# Allegro board fpga_ccd_3.brd
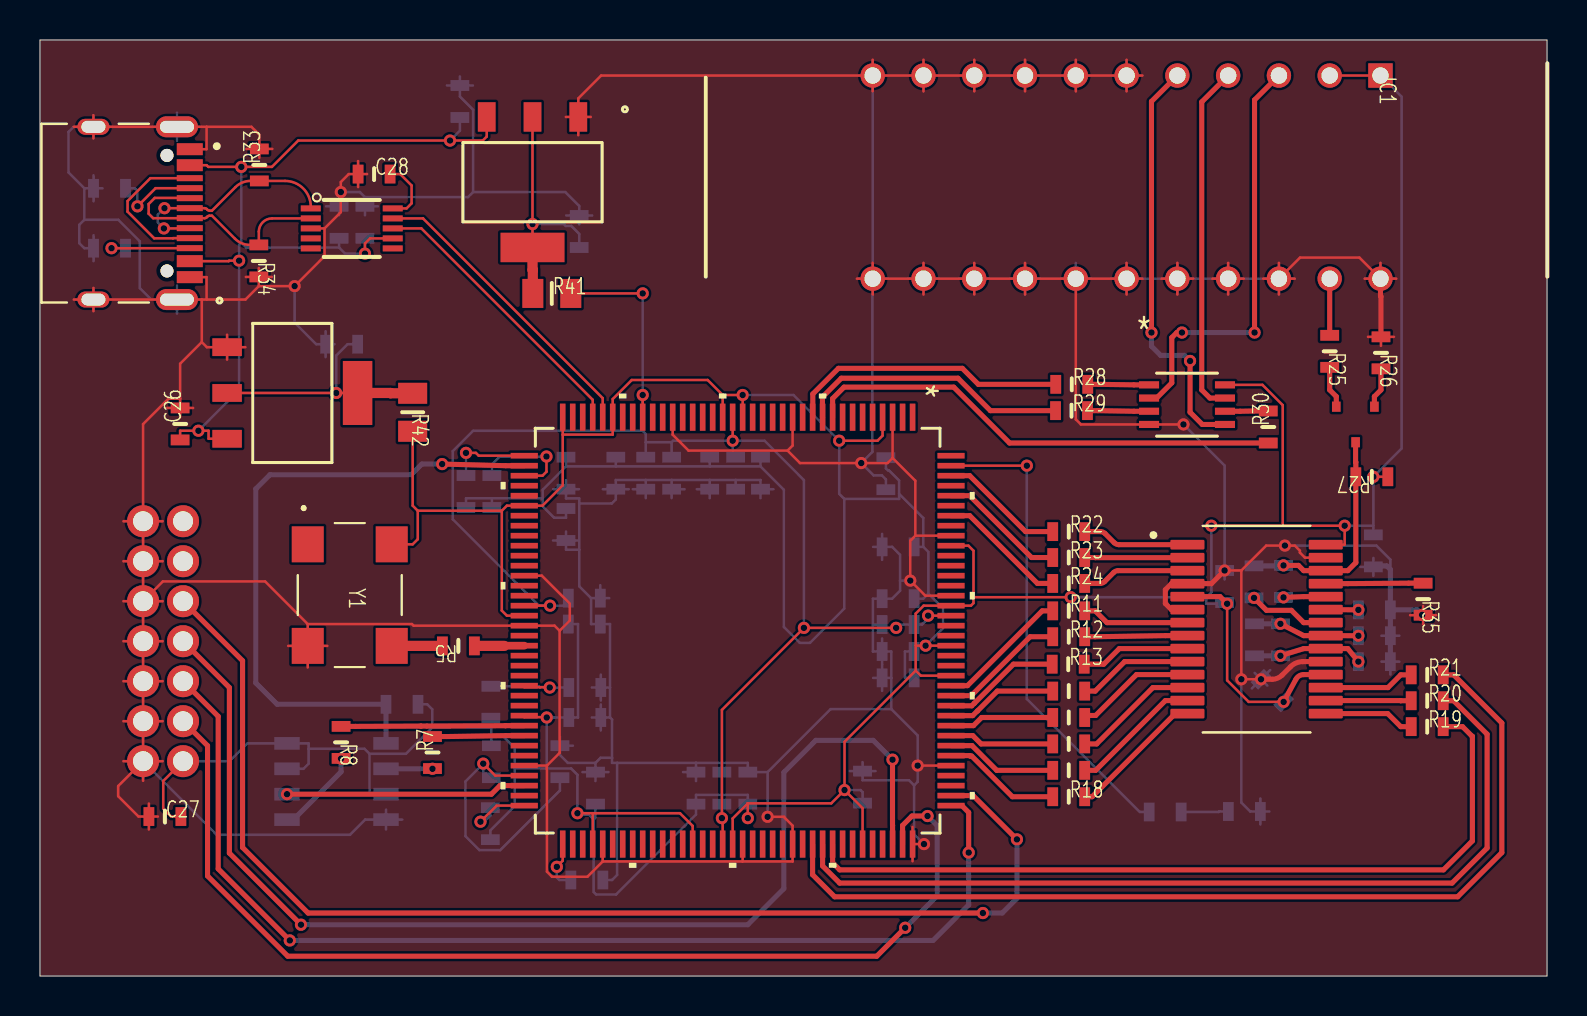
[diagram p0: board, top side]
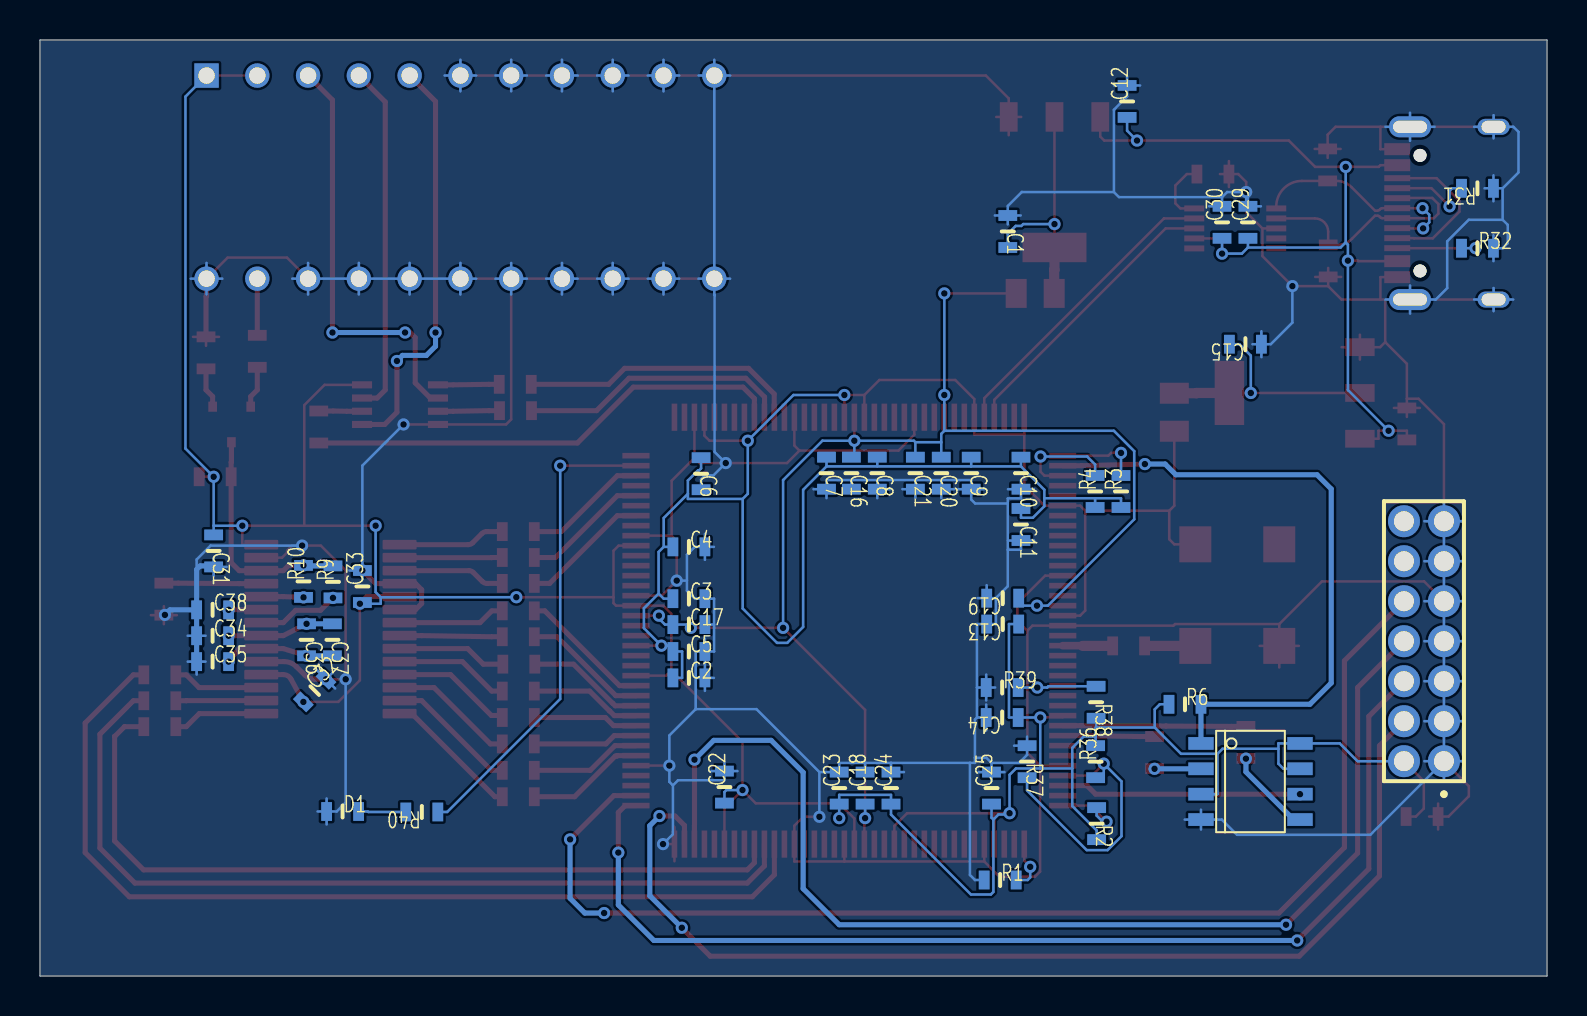
[diagram p1: board, bottom side, seen from below]

Outline 75.39 x 46.81 mm; copper layers: TOP, BOTTOM. Coordinates in mm from the lower left corner of the outline.
Outline path: 0,46.81 0,0 75.39,0 75.39,46.81 0,46.81

## Design rules (mm)
constraint set DEFAULT: min track width 0.127, pair gap 0.127
net group +1.2V: nets +1.2V N30787
net group ADCCLK: nets ADCCLK N43709
net group CCD_ICG: nets CCD_ICG N45930
net group CCD_MASTER: nets CCD_MASTER N46162
net group CCD_SH: nets CCD_SH N46224
net group CDSCLK1: nets CDSCLK1 N43637
net group CDSCLK2: nets CDSCLK2 N43673
net group CLK_50M: nets CLK_50M N10342
net group HT82V38_D0: nets HT82V38_D0 N42823
net group HT82V38_D1: nets HT82V38_D1 N42829
net group HT82V38_D2: nets HT82V38_D2 N42835
net group HT82V38_D3: nets HT82V38_D3 N42817
net group HT82V38_D4: nets HT82V38_D4 N42805
net group HT82V38_D5: nets HT82V38_D5 N42799
net group HT82V38_D6: nets HT82V38_D6 N42811
net group HT82V38_D7: nets HT82V38_D7 N42841
net group N39901: nets N39901 N39920
net group N45186: nets N45080 N45186
net group N103582: nets N103518 N103582
net group SCLK: nets N39538 SCLK
net group SDATA: nets N39540 SDATA
net group SLOAD: nets N39536 SLOAD
net group SPI_FLASH_MISO: nets N10587 SPI_FLASH_MISO
net group SPI_FLASH_MOSI: nets N10677 SPI_FLASH_MOSI
net group USB_D: nets USB_D+ USB_D-
net group CCD_OS: nets CCD_OS N41358 N41362

## Placement (name value [footprint] x y rotation side)
C1  10uF  [0603]  26.97 37.24 270 bottom
C2  10uF  [0603]  42.93 14.91 180 bottom
C3  100nF  [0603]  42.93 18.87 180 bottom
C4  100nF  [0603]  42.93 21.46 180 bottom
C5  100nF  [0603]  42.93 16.23 180 bottom
C6  100nF  [0603]  42.32 25.12 270 bottom
C7  100nF  [0603]  36.04 25.15 270 bottom
C8  100nF  [0603]  33.5 25.15 270 bottom
C9  100nF  [0603]  28.8 25.15 270 bottom
C10  100nF  [0603]  26.31 25.15 270 bottom
C11  100nF  [0603]  26.31 22.58 270 bottom
C12  10uF  [0603]  21.01 43.74 90 bottom
C13  100nF  [0603]  27.23 17.6 0 bottom
C14  100nF  [0603]  27.25 12.93 0 bottom
C15  10uF  [0603]  15.09 31.6 0 bottom
C16  10uF  [0603]  34.8 25.15 270 bottom
C17  100nF  [0603]  42.93 17.58 180 bottom
C18  100nF  [0603]  34.11 9.4 90 bottom
C19  100nF  [0603]  27.23 18.9 0 bottom
C20  100nF  [0603]  30.3 25.15 270 bottom
C21  100nF  [0603]  31.6 25.15 270 bottom
C22  100nF  [0603]  41.15 9.45 90 bottom
C23  100nF  [0603]  35.41 9.4 90 bottom
C24  100nF  [0603]  32.82 9.4 90 bottom
C25  100nF  [0603]  27.79 9.4 90 bottom
C26  10uF  [0603]  7.01 27.61 90 top
C27  100nF  [0603]  6.25 7.98 0 top
C28  100nF  [0603]  16.71 40.11 0 top
C29  10uF  [0603]  14.96 37.69 90 bottom
C30  10uF  [0603]  16.26 37.69 90 bottom
C31  100nF  [0603]  66.7 21.26 270 bottom
C32  100nF  [0603]  61.65 14.27 135 bottom
C33  100nF  [0603]  59.26 19.48 90 bottom
C34  100nF  [0603]  66.75 17.02 180 bottom
C35  100nF  [0603]  66.75 15.72 180 bottom
C36  100nF  [0603]  62.05 16.81 270 bottom
C37  10uF  [0603]  60.76 16.81 270 bottom
C38  100nF  [0603]  66.75 18.31 180 bottom
D1  LED  [0603]  60.25 8.23 180 bottom
IC1  TCD1304DG_8Z_AW_  [DIP1016W62P254L4160H372Q22N]  67.06 45.03 270 top
J1  CONN SOCKET 7x2  [CONN_BULK_HEADER_2X7_2_2]  5.16 10.74 90 bottom
J2  CQ-USB-C16PSMT01  [SHENZHEN-CHUANGQIN-TECHNOLO]  7.49 38.15 270 top
Q1  2SA1015  [SOT23]  65.81 27.58 270 top
R1  4.7K  [0603]  27.36 4.8 180 bottom
R2  4.7K  [0603]  22.53 7.62 270 bottom
R3  4.7K  [0603]  21.31 24.23 90 bottom
R4  4.7K  [0603]  22.61 24.23 90 bottom
R5  33  [0603]  20.93 16.51 180 top
R6  4.7K  [0603]  18.11 13.59 180 bottom
R7  33  [0603]  19.63 11.18 90 top
R8  33  [0603]  15.06 11.68 270 top
R9  NC  [0603]  60.73 19.71 90 bottom
R10  NC  [0603]  62.2 19.74 90 bottom
R11  33R  [0603]  51.46 18.26 0 top
R12  33R  [0603]  51.46 16.97 0 top
R13  33R  [0603]  51.43 15.6 0 top
R14  33R  [0603]  51.46 14.25 0 top
R15  33R  [0603]  51.46 12.93 0 top
R16  33R  [0603]  51.46 11.61 0 top
R17  33R  [0603]  51.46 10.29 0 top
R18  33R  [0603]  51.46 8.97 0 top
R19  33R  [0603]  69.39 12.47 0 top
R20  33R  [0603]  69.39 13.77 0 top
R21  33R  [0603]  69.39 15.06 0 top
R22  33R  [0603]  51.46 22.23 0 top
R23  33R  [0603]  51.46 20.93 0 top
R24  33R  [0603]  51.46 19.63 0 top
R25  150R  [0603]  64.52 31.24 270 top
R26  150R  [0603]  67.08 31.17 270 top
R27  150R  [0603]  66.62 24.97 180 top
R28  33R  [0603]  51.61 29.59 0 top
R29  33R  [0603]  51.6 28.27 0 top
R30  33R  [0603]  61.44 27.46 90 top
R31  5.1K  [0603]  3.48 39.4 0 bottom
R32  5.1K  [0603]  3.48 36.4 180 bottom
R33  45R  [0603]  10.97 40.56 90 top
R34  45R  [0603]  10.95 35.76 270 top
R35  1K  [0603]  69.19 18.85 270 top
R36  0R  [0603]  22.58 10.72 90 bottom
R37  NC  [0603]  26.01 10.72 270 bottom
R38  NC  [0603]  22.56 13.69 270 bottom
R39  1K  [0603]  27.25 14.43 180 bottom
R40  1K  [0603]  56.29 8.2 0 bottom
R41  10R  [0805]  25.6 34.14 0 top
R42  10R  [0805]  18.64 28.19 270 top
U1  XC6SLX9-2TQG144C_A  [TQG144_XIL]  34.9 17.27 270 top
U2  AMS1117-1.2v  [SOT_AMS1117-2P5_AMS]  24.64 39.7 180 top
U3  AMS1117-3.3v  [SOT_AMS1117-2P5_AMS]  12.62 29.16 270 top
U4  M25P16-VMN6TPBA  [SOIC8]  14.83 9.73 180 bottom
U5  CH340E  [MSOP-10]  15.6 37.39 0 top
U6  HT82V38  [SSOP-28]  60.86 17.35 0 top
U7  TC7WH14FU  [SSOP-8]  57.38 28.58 0 top
Y1  50MHz  [SMD7050]  15.49 19.05 270 top

## Library data of the parts
C1-C38 = CAP NP
D1 = LED
IC1 = TCD1304DG_8Z,AW_
J1 = CONN SOCKET 7x2
J2 = USB-C 16pin
Q1 = 2N6520
R1-R5 R7 R8 R36-R39 = RESISTOR
R6 = Res 0603
R9-R35 R40-R42 = R
U1 = XC6SLX9-2TQG144C: User Part Number: PN; Tolerance: TOL
U2 U3 = AMS1117: User Part Number: PN; Tolerance: TOL
U4 = M25P16-VMN6TPBA: Tolerance: ***; User Part Number: ***
U5 = CH340E
U6 = HT82V38
U7 = TC7WH14FU: User Part Number: PN; Tolerance: TOL
Y1 = Oscillator 4p

## Footprints (pads in the part's own frame, mm; a bottom-side part is the same pattern mirrored in y, then rotated)
0603
  rect 0.54x0.94 smd: 1(-0.8,0) 2(0.8,0)
0805
  rect 1.05x1.45 smd: 1(-0.95,0) 2(0.95,0)
CONN_BULK_HEADER_2X7_2_2
  round 1.6 hole 1: 1(0,0) 2(0,2) 3(2,0) 4(2,2) 5(4,0) 6(4,2) 7(6,0) 8(6,2) 9(8,0) 10(8,2) 11(10,0) 12(10,2) 13(12,0) 14(12,2)
DIP1016W62P254L4160H372Q22N
  rect 1.22x1.22 hole 0.82: 1(0,0)
  round 1.22 hole 0.82: 2(0,-2.54) 3(0,-5.08) 4(0,-7.62) 5(0,-10.16) 6(0,-12.7) 7(0,-15.24) 8(0,-17.78) 9(0,-20.32) 10(0,-22.86) 11(0,-25.4) 12(10.16,-25.4) 13(10.16,-22.86) 14(10.16,-20.32) 15(10.16,-17.78) 16(10.16,-15.24) 17(10.16,-12.7) 18(10.16,-10.16) 19(10.16,-7.62) 20(10.16,-5.08) 21(10.16,-2.54) 22(10.16,0)
MSOP-10
  rect 1x0.3 smd: 1(-2.05,1) 2(-2.05,0.5) 3(-2.05,0) 4(-2.05,-0.5) 5(-2.05,-1) 6(2.05,-1) 7(2.05,-0.5) 8(2.05,0) 9(2.05,0.5) 10(2.05,1)
SHENZHEN-CHUANGQIN-TECHNOLO
  round 0.65 hole 0.65 unplated: (-2.89,-1.14) (2.89,-1.14)
  rect 0.6x1.3 smd: A1_B12(-3.2,0) A4_B9(-2.4,0) B1_A12(3.2,0) B4_A9(2.4,0)
  rect 0.3x1.3 smd: A5(-1.25,0) A6(-0.25,0) A7(0.25,0) A8(1.25,0) B5(1.75,0) B6(0.75,0) B7(-0.75,0) B8(-1.75,0)
  oval 1.05x2.1 hole 0.6x1.7: S1(-4.32,-0.64) S2(4.32,-0.64)
  oval 0.8x1.6 hole 0.6x1.2: S3(-4.32,-4.82) S4(4.32,-4.82)
SMD7050
  rect 1.8x1.6 smd: 1(-2.54,-2.1) 2(2.54,-2.1) 3(2.54,2.1) 4(-2.54,2.1)
SOIC8
  rect 1.27x0.635 smd: 1(-2.477,1.905) 2(-2.477,0.635) 3(-2.477,-0.635) 4(-2.477,-1.905) 5(2.477,-1.905) 6(2.477,-0.635) 7(2.477,0.635) 8(2.477,1.905)
SOT23
  rect 0.508x0.432 smd: 1(-0.889,0.94) 2(-0.889,-0.965) 3(0.889,0)
SOT_AMS1117-2P5_AMS
  rect 0.889x1.473 smd: 1(-2.29,-3.264) 2(0,-3.264) 3(2.29,-3.264)
  rect 3.2x1.473 smd: 4(0,3.264)
SSOP-8
  rect 1.003x0.356 smd: 1(-1.899,0.991) 2(-1.899,0.33) 3(-1.899,-0.33) 4(-1.899,-0.991) 5(1.899,-0.991) 6(1.899,-0.33) 7(1.899,0.33) 8(1.899,0.991)
SSOP-28
  custom 1.7x0.48 smd: 1(-3.46,4.225) 2(-3.46,3.575) 3(-3.46,2.925) 4(-3.46,2.275) 5(-3.46,1.625) 6(-3.46,0.975) 7(-3.46,0.325) 8(-3.46,-0.325) 9(-3.46,-0.975) 10(-3.46,-1.625) 11(-3.46,-2.275) 12(-3.46,-2.925) 13(-3.46,-3.575) 14(-3.46,-4.225) 15(3.46,-4.225) 16(3.46,-3.575) 17(3.46,-2.925) 18(3.46,-2.275) 19(3.46,-1.625) 20(3.46,-0.975) 21(3.46,-0.325) 22(3.46,0.325) 23(3.46,0.975) 24(3.46,1.625) 25(3.46,2.275) 26(3.46,2.925) 27(3.46,3.575) 28(3.46,4.225)
TQG144_XIL
  rect 1.359x0.279 smd: 1(-10.674,8.75) 2(-10.674,8.25) 3(-10.674,7.75) 4(-10.674,7.25) 5(-10.674,6.75) 6(-10.674,6.25) 7(-10.674,5.75) 8(-10.674,5.25) 9(-10.674,4.75) 10(-10.674,4.25) 11(-10.674,3.75) 12(-10.674,3.25) 13(-10.674,2.75) 14(-10.674,2.25) 15(-10.674,1.75) 16(-10.674,1.25) 17(-10.674,0.75) 18(-10.674,0.25) 19(-10.674,-0.25) 20(-10.674,-0.75) 21(-10.674,-1.25) 22(-10.674,-1.75) 23(-10.674,-2.25) 24(-10.674,-2.75) 25(-10.674,-3.25) 26(-10.674,-3.75) 27(-10.674,-4.25) 28(-10.674,-4.75) 29(-10.674,-5.25) 30(-10.674,-5.75) 31(-10.674,-6.25) 32(-10.674,-6.75) 33(-10.674,-7.25) 34(-10.674,-7.75) 35(-10.674,-8.25) 36(-10.674,-8.75) 73(10.674,-8.75) 74(10.674,-8.25) 75(10.674,-7.75) 76(10.674,-7.25) 77(10.674,-6.75) 78(10.674,-6.25) 79(10.674,-5.75) 80(10.674,-5.25) 81(10.674,-4.75) 82(10.674,-4.25) 83(10.674,-3.75) 84(10.674,-3.25) 85(10.674,-2.75) 86(10.674,-2.25) 87(10.674,-1.75) 88(10.674,-1.25) 89(10.674,-0.75) 90(10.674,-0.25) 91(10.674,0.25) 92(10.674,0.75) 93(10.674,1.25) 94(10.674,1.75) 95(10.674,2.25) 96(10.674,2.75) 97(10.674,3.25) 98(10.674,3.75) 99(10.674,4.25) 100(10.674,4.75) 101(10.674,5.25) 102(10.674,5.75) 103(10.674,6.25) 104(10.674,6.75) 105(10.674,7.25) 106(10.674,7.75) 107(10.674,8.25) 108(10.674,8.75)
  rect 0.279x1.359 smd: 37(-8.75,-10.674) 38(-8.25,-10.674) 39(-7.75,-10.674) 40(-7.25,-10.674) 41(-6.75,-10.674) 42(-6.25,-10.674) 43(-5.75,-10.674) 44(-5.25,-10.674) 45(-4.75,-10.674) 46(-4.25,-10.674) 47(-3.75,-10.674) 48(-3.25,-10.674) 49(-2.75,-10.674) 50(-2.25,-10.674) 51(-1.75,-10.674) 52(-1.25,-10.674) 53(-0.75,-10.674) 54(-0.25,-10.674) 55(0.25,-10.674) 56(0.75,-10.674) 57(1.25,-10.674) 58(1.75,-10.674) 59(2.25,-10.674) 60(2.75,-10.674) 61(3.25,-10.674) 62(3.75,-10.674) 63(4.25,-10.674) 64(4.75,-10.674) 65(5.25,-10.674) 66(5.75,-10.674) 67(6.25,-10.674) 68(6.75,-10.674) 69(7.25,-10.674) 70(7.75,-10.674) 71(8.25,-10.674) 72(8.75,-10.674) 109(8.75,10.674) 110(8.25,10.674) 111(7.75,10.674) 112(7.25,10.674) 113(6.75,10.674) 114(6.25,10.674) 115(5.75,10.674) 116(5.25,10.674) 117(4.75,10.674) 118(4.25,10.674) 119(3.75,10.674) 120(3.25,10.674) 121(2.75,10.674) 122(2.25,10.674) 123(1.75,10.674) 124(1.25,10.674) 125(0.75,10.674) 126(0.25,10.674) 127(-0.25,10.674) 128(-0.75,10.674) 129(-1.25,10.674) 130(-1.75,10.674) 131(-2.25,10.674) 132(-2.75,10.674) 133(-3.25,10.674) 134(-3.75,10.674) 135(-4.25,10.674) 136(-4.75,10.674) 137(-5.25,10.674) 138(-5.75,10.674) 139(-6.25,10.674) 140(-6.75,10.674) 141(-7.25,10.674) 142(-7.75,10.674) 143(-8.25,10.674) 144(-8.75,10.674)

## Nets
+1.2V: C16.1 C17.1 C18.1 C19.1 C20.1 C21.1 R41.2 U1.19 U1.28 U1.52 U1.89 U1.128
+3.3V: C2.1 C3.1 C4.1 C5.1 C6.1 C7.1 C8.1 C9.1 C10.1 C11.1 C13.1 C14.1 C22.1 C23.1 C24.1 C25.1 C27.2 C31.1 C32.1 C33.1 IC1.1(\VDD\) IC1.2 J1.2 R2.2 R3.1 R4.1 R6.1 R27.1 R36.2 R38.2 R42.2 U1.4 U1.18 U1.20 U1.31 U1.36 U1.42 U1.53 U1.63 U1.76 U1.86 U1.90 U1.103(\VCCO_1_2\) U1.122 U1.125 U1.129 U1.135 U4.3(\W-\) U4.7 U4.8 U6.5 U6.18 U6.28 U7.8(\VCC\) Y1.4(\VCC\)
+5V: C12.1 C26.1 C29.1 C30.1 J2.A4_B9 J2.B4_A9(\VBUS#B4_A9\) U2.3 U3.3 U5.7(\VCC\)
GND: C1.1 C2.2 C3.2 C4.2 C5.2 C6.2 C7.2 C8.2 C9.2 C10.2 C11.2 C12.2 C13.2 C14.2 C15.1 C16.2 C17.2 C18.2 C19.2 C20.2 C21.2 C22.2 C23.2 C24.2 C25.2 C26.2 C27.1 C28.1 C29.2 C30.2 C31.2 C32.2 C33.2 C34.1 C35.1 C38.1 D1.1(\CATHODE\) IC1.6 IC1.7 IC1.8 IC1.9 IC1.10 IC1.11 IC1.12 IC1.13 IC1.14 IC1.15 IC1.16 IC1.17 IC1.18 IC1.19 IC1.20 IC1.22 J1.1 J1.3 J1.5 J1.7 J1.9 J1.11 J1.13 J2.A1_B12 J2.B1_A12 J2.S1 J2.S2 J2.S3 J2.S4 R1.1 R26.1 R31.1 R32.2 R33.2 R34.2 R35.2 R37.1 R39.1 U1.3 U1.13 U1.25 U1.49 U1.54 U1.68 U1.77 U1.91 U1.96 U1.108 U1.113 U1.130 U1.136 U2.1 U3.1 U4.4 U5.3 U6.4 U6.6 U6.19 U6.27 U7.4 Y1.2
ADCCLK: R24.1 U1.138
CCD_ICG: R30.1 U1.9
CCD_MASTER: R28.1 U1.11
CCD_OS: Q1.3 R9.2 R10.2 R27.2 U6.26(\VINR\)
CCD_SH: R29.1 U1.10
CDSCLK1: R22.1 U1.142
CDSCLK2: R23.1 U1.140
CLK_50M: R5.1 U1.56
HT82V38_D0: R18.1 U1.114
HT82V38_D1: R17.1 U1.115
HT82V38_D2: R16.1 U1.116
HT82V38_D3: R15.1 U1.117
HT82V38_D4: R14.1 U1.118
HT82V38_D5: R13.1 U1.119
HT82V38_D6: R12.1 U1.120
HT82V38_D7: R11.1 U1.121
M0: R36.1 R37.2 U1.69
M1: R38.1 R39.2 U1.60
SCLK: R20.2 U1.99
SDATA: R19.2 U1.100
SLOAD: R21.2 U1.98
SPI_FLASH_CLK: U1.70 U4.6
SPI_FLASH_CSO: R6.2 U1.38 U4.1
SPI_FLASH_MISO: R7.2 U1.65
SPI_FLASH_MOSI: R8.1 U1.64
TCK_F: J1.6 U1.109
TDI_F: J1.10 U1.110
TDO_F: J1.8 U1.106
TMS_F: J1.4(9) U1.107
UART_RXD: U1.33 U5.8
UART_TXD: U1.32 U5.9
USB_D+: J2.A6 J2.B6 R33.1 U5.1
USB_D-: J2.A7 J2.B7 R34.1 U5.2
N00968: R4.2 U1.39
N10342: R5.2 Y1.3
N10587: R7.1 U4.2
N10677: R8.2 U4.5
N14884: R3.2 U1.37
N15354: R1.2 U1.73
N15645: R2.1 U1.72
N29928: C28.2 U5.10
N30787: C1.2 R41.1 U2.2 U2.4(\VOUT\)
N30939: C15.2 R42.1 U3.2 U3.4(\VOUT\)
N39536: R21.1 U6.17
N39538: R20.1 U6.16
N39540: R19.1 U6.15
N39901: C35.2 C36.2 C37.2 U6.20
N39920: C34.2 C36.1 C37.1 U6.21
N40100: C38.2 U6.23
N41358: R10.1 U6.24
N41362: R9.1 U6.22
N41426: R35.1 U6.25
N42799: R13.2 U6.9
N42805: R14.2 U6.10
N42811: R12.2 U6.8
N42817: R15.2 U6.11
N42823: R18.2 U6.14
N42829: R17.2 U6.13
N42835: R16.2 U6.12
N42841: R11.2 U6.7
N43637: R22.2 U6.1
N43673: R23.2 U6.2
N43709: R24.2 U6.3
N45080: IC1.21 R25.1
N45186: Q1.2 R25.2
N45216: Q1.1(\EMITTER\) R26.2
N45901: IC1.5 U7.5
N45905: IC1.3 U7.2
N45930: R30.2 U7.6
N46162: R28.2 U7.1
N46224: R29.2 U7.3
N46412: IC1.4 U7.7
N48976: J2.B5 R32.1
N49298: J2.A5 R31.2
N49459: J2.A8 J2.B8
N103518: R40.1 U1.143
N103582: D1.2 R40.2

Pads without a net: J1 12 14; U1 1 2 5 6 7 8 12 14 15 16 17 21 22 23 24 26 27 29 30 34 35 40 41 43 44 45 46 47 48 50 51 55 57 58 59 61 62 66 67 71 74 75 78 79 80 81 82 83 84 85 87 88 92 93 94 95 97 101 102 104 105 111 112 123 124 126 127 131 132 133 134 137 139 141 144; U5 4 5 6; Y1 1

## Via types
v1: diameter 0.61, hole 0.33, TOP to BOTTOM, 76 vias

## Routing (per net, layer and track width the routed paths; a pad name or vN(x,y) marks a point on that pad's centre or on a via; arc(x,y) is an arc through that point)
+1.2V: length 75.5
  TOP w0.127: R41.2 v1(30.15,34.14) ; U1.52 v1(25.51,18.52) ; v1(42.83,17.41) v1(38.21,17.41) 34.11,13.31 v1(34.11,7.9) 34.15,7.86 U1.89 ; U1.28 v1(30.15,29.06) ; U1.19 v1(34.65,26.77) ; U1.128 v1(44.43,18.02)
  BOTTOM w0.127: 30.15,27.27 30.3,27.11 30.3,26.7 ; 30.15,27.27 21.67,27.27 20.65,26.25 20.65,22.84 24.97,18.52 v1(25.51,18.52) 26.43,18.52 C19.1 ; 30.15,27.27 v1(30.15,29.06) v1(30.15,34.14) ; v1(38.21,17.41) 38.21,24.8 36.25,26.77 v1(34.65,26.77) ; v1(34.65,26.77) 31.67,26.77 31.6,26.7 ; v1(34.65,26.77) 34.65,25.95 C16.1 ; C18.1 v1(34.11,7.9) ; v1(42.83,17.41) 42.99,17.58 C17.1 44.12,17.58 44.43,17.88 v1(44.43,18.02) ; 30.3,26.7 31.6,26.7 ; 30.3,26.7 C20.1 ; 31.6,26.7 C21.1
+3.3V: length 292.2
  TOP w0.127: v1(40.25,9.3) 39.58,8.64 35.41,8.64 ; v1(40.25,9.3) 40.25,11.72 43.81,15.28 ; v1(40.25,9.3) 41.15,8.4 U1.103 ; 43.81,15.28 44.06,15.02 U1.122 ; 43.81,15.28 43.81,16.52 ; v1(62.21,13.71) 60.46,13.71 59.39,14.79 v1(59.39,18.62) ; v1(51.56,18.95) 46.7,18.95 ; 46.7,18.95 46.7,21.27 46.44,21.52 U1.135 ; 46.7,18.95 46.7,18.65 46.57,18.52 U1.129 44.2,18.52 43.81,18.12 43.81,16.52 ; U1.125 v1(44.3,16.52) 43.81,16.52 ; 18.9,23.27 23.1,23.27 ; 18.9,23.27 18.64,23.52 R42.2 ; 18.9,23.27 18.9,21.84 18.64,21.59 Y1.4 ; 23.1,23.27 23.1,18.28 23.36,18.02 U1.53 ; 23.1,23.27 23.36,23.52 U1.42 25.13,23.52 26.15,24.54 26.15,27.08 ; v1(39.98,26.77) 41.9,26.77 42.15,27.03 U1.4 ; U6.28 65.27,21.57 v1(65.27,22.52) 62.17,22.52 ; R27.1 v1(66.7,24.97) ; C27.2 6.56,7.98 6.17,8.37 6.17,9.75 J1.2 ; 26.15,27.08 28.65,27.08 U1.31 28.65,28.85 29.6,29.81 33.4,29.81 34.15,29.06 ; 26.15,27.08 U1.36 ; U1.18 v1(35.15,29.06) 34.15,29.06 ; 34.15,29.06 U1.20 ; 35.41,8.64 v1(35.41,7.9) ; 35.41,8.64 34.65,7.88 U1.90 ; U7.8 61.15,29.57 62.17,28.55 62.17,22.52 ; 27.65,8.14 v1(26.89,8.14) ; 27.65,8.14 U1.76 ; 27.65,8.14 32.01,8.14 32.65,7.51 U1.86 ; 62.17,22.52 v1(58.6,22.52) ; U1.63 24.23,12.95 25.33,12.95 v1(25.35,12.93) ; IC1.2 IC1.1
  TOP w0.254: U6.18 63.21,15.07 arc(62.99,15.01) 62.83,14.84 v1(62.21,13.71) ; v1(59.39,18.62) 59.03,18.97 U6.5
  BOTTOM w0.127: v1(40.25,9.3) 41.05,9.3 41.15,9.2 C22.1 ; 25.35,10.38 v1(25.35,12.93) C14.1 26.91,12.93 26.91,17.6 C13.1 ; 25.35,10.38 26.57,10.38 26.89,10.06 v1(26.89,8.14) 26.95,8.08 27.44,8.08 27.7,7.82 ; 25.35,10.38 23.75,10.38 ; C3.1 44.19,18.87 44.44,19.13 ; 13.44,11.37 13.44,11.63 U4.8 10.37,11.63 9.48,10.74 J1.2 ; 13.44,11.37 16.23,11.37 16.48,11.11 ; 13.44,11.37 13.44,10.62 13.18,10.36 U4.7 ; 66.7,22.52 v1(66.7,24.97) 68.11,26.38 68.11,43.98 IC1.1 ; 66.7,22.52 C31.1 ; 66.7,22.52 v1(65.27,22.52) ; 44.44,19.13 44.44,21.21 44.19,21.46 ; 44.44,19.13 45.18,18.39 45.18,17.4 v1(44.3,16.52) 43.73,16.52 C5.1 43.27,16.23 43.27,14.91 C2.1 ; 40.23,23.86 40.23,18.38 38.52,16.66 38.01,16.66 37.21,17.46 37.21,24.32 36.04,25.49 ; 40.23,23.86 39.98,24.11 v1(39.98,26.77) 37.69,29.06 v1(35.15,29.06) ; 40.23,23.86 42.98,23.86 42.98,24.11 ; 19.62,12.43 18.31,11.11 16.48,11.11 ; 19.62,12.43 19.62,13.33 19.37,13.59 R6.1 ; 19.62,12.43 22.56,12.43 ; R4.1 22.61,23.89 ; 22.61,23.89 21.31,23.89 R3.1 ; 22.61,23.89 25.15,23.89 ; 27.7,7.82 27.7,4.2 27.82,4.08 28.82,4.08 32.82,8.08 C24.1 32.82,9.06 35.41,9.06 C23.1 v1(35.41,7.9) ; 27.7,7.82 27.79,7.92 C25.1 ; 44.19,21.46 44.19,22.9 42.98,24.11 ; 44.19,21.46 C4.1 ; C6.1 42.32,25.39 42.42,25.29 42.47,25.29 42.98,24.78 42.98,24.11 ; v1(59.39,18.62) 58.34,18.62 58.34,18.95 ; 36.04,25.49 33.5,25.49 ; 36.04,25.49 C7.1 ; U4.3 16.48,9.09 16.48,11.11 ; 22.58,11.98 22.58,12.4 22.56,12.43 ; 22.58,11.98 R36.2 ; 22.58,11.98 23.18,11.98 23.75,11.41 23.75,10.38 ; 22.56,12.43 R38.2 ; 33.5,25.49 28.8,25.49 ; 33.5,25.49 C8.1 ; 25.15,23.89 25.15,24.32 26.31,25.49 ; 25.15,23.89 25.15,23.49 25.72,22.92 26.31,22.92 C11.1 ; 23.75,10.38 23.75,8.5 22.53,7.28 R2.2 ; 58.34,18.95 58.6,19.2 v1(58.6,22.52) ; 58.34,18.95 v1(51.56,18.95) ; 28.8,25.49 26.31,25.49 ; 28.8,25.49 C9.1 ; 26.31,25.49 C10.1
+5V: length 47.3
  TOP w0.127: v1(9.96,35.78) 9.47,35.78 9.44,35.75 J2.B4_A9 ; C26.1 7.01,27.27 v1(7.92,27.27) 8.43,27.27 8.43,26.87 U3.3 ; U5.7 16.51,36.89 16.26,36.63 v1(16.26,36.13) ; U2.3 22.35,41.98 22.15,41.78 v1(20.51,41.78) 12.92,41.78 11.6,40.47 v1(10.07,40.47) 8.42,40.47 8.33,40.55 J2.A4_B9
  BOTTOM w0.127: C29.1 14.96,36.43 ; 14.96,36.43 10.33,36.43 10.07,36.69 ; 14.96,36.43 15.27,36.13 v1(16.26,36.13) C30.1 ; 10.07,36.69 9.96,36.58 v1(9.96,35.78) 9.96,29.31 v1(7.92,27.27) ; 10.07,36.69 v1(10.07,40.47) ; C12.1 21.01,42.28 v1(20.51,41.78)
GND: length 630.8
  TOP w0.127: J1.7 6.13,16.74 ; J1.7 5.16,17.72 ; J1.7 4.18,16.74 ; J1.7 5.16,15.77 ; IC1.6 55.14,45.03 ; IC1.6 IC1.7 ; IC1.6 54.36,45.82 ; IC1.6 54.36,44.25 ; J1.3 5.16,13.72 ; J1.3 5.16,11.77 ; J1.3 4.18,12.74 ; J1.3 6.13,12.74 ; U3.1 8.35,31.45 8.09,31.7 ; U3.1 9.36,30.83 ; U3.1 10.27,31.45 ; U3.1 9.36,32.07 ; 44.2,44.25 IC1.10 ; IC1.10 IC1.9 ; IC1.10 44.2,45.82 ; IC1.10 IC1.11 ; J1.1 5.16,11.72 ; J1.1 6.13,10.74 ; J1.1 4.18,10.74 ; J1.1 5.16,9.77 ; J1.1 3.91,9.5 3.91,8.99 4.93,7.98 C27.1 ; IC1.7 IC1.8 ; IC1.7 51.82,44.25 ; IC1.7 51.82,45.82 ; 5.16,17.77 J1.9 ; J1.9 6.15,19.73 11.26,19.73 13.39,17.6 ; J1.9 6.13,18.74 ; J1.9 5.16,19.72 ; J1.9 4.18,18.74 ; 67.08,31.52 R26.1 ; R26.1 66.43,31.97 ; R26.1 67.73,31.97 ; 8.33,42.47 8.33,41.35 J2.A1_B12 ; 8.33,42.47 10.58,42.47 10.97,42.07 R33.2 ; 8.33,42.47 J2.S1 J2.S3 ; 61.98,34.09 IC1.20 ; IC1.20 62.76,34.87 ; IC1.20 61.19,34.87 ; IC1.20 61.98,35.66 ; IC1.20 63.03,35.93 66,35.93 IC1.22 ; 28.15,5.73 27.39,4.97 25.61,4.97 25.36,5.22 25.36,10.52 ; 28.15,5.73 U1.77 ; 28.15,5.73 35.15,5.73 ; 8.09,31.7 7.01,30.62 7.01,28.87 ; 8.09,31.7 8.09,33.83 ; C27.1 5.45,8.62 ; C27.1 5.45,7.33 ; C27.1 5.9,7.98 ; IC1.18 57.68,34.87 ; IC1.18 56.9,35.66 ; IC1.18 56.11,34.87 ; IC1.18 56.9,34.09 ; 26.31,42.96 U2.1 ; U2.1 26.93,43.89 28.07,45.03 IC1.11 ; U2.1 26.93,42.05 ; U2.1 27.55,42.96 ; 25.36,10.52 25.99,11.16 25.99,17.27 ; 25.36,10.52 U1.68 ; v1(57.2,27.58) U7.4 52.07,27.58 51.82,27.84 IC1.16 ; 8.33,33.83 8.33,34.95 J2.B1_A12 ; 8.33,33.83 10.28,33.83 10.95,34.5 ; 8.33,33.83 8.09,33.83 ; U5.3 14.24,37.39 ; 14.24,37.39 14.24,36 v1(12.74,34.5) 10.95,34.5 ; 14.24,37.39 15.05,38.2 v1(15.05,39.21) 15.05,39.71 15.45,40.11 C28.1 ; IC1.11 41.66,44.25 ; IC1.11 41.66,45.82 ; 7.01,28.87 6.43,28.87 5.16,27.6 J1.13 ; 7.01,28.87 C26.2 ; C28.1 16.36,40.11 ; C28.1 15.91,40.76 ; C28.1 15.91,39.46 ; 4.18,22.74 J1.13 ; J1.13 6.13,22.74 ; J1.13 5.16,21.77 ; IC1.12 IC1.13 ; IC1.12 40.87,34.87 ; IC1.12 41.66,34.09 ; IC1.12 41.66,35.66 ; IC1.13 44.2,34.09 ; IC1.13 IC1.14 ; IC1.13 44.2,35.66 ; 43.79,22.02 43.79,24.77 42.65,25.91 ; 43.79,22.02 43.54,21.77 v1(43.54,19.77) 44.29,19.02 U1.130 ; 43.79,22.02 U1.136 ; U1.3 42.65,25.91 ; 42.65,25.91 42.4,25.65 v1(41.08,25.65) 38.02,25.65 37.4,26.28 ; U1.108 43.65,7.46 ; U1.108 43.65,5.74 ; U1.108 v1(44.22,6.6) ; R35.2 69.19,18.5 ; R35.2 68.54,18.05 ; R35.2 69.84,18.05 ; R35.2 69.19,17.6 ; U1.91 35.15,5.73 ; 35.15,5.73 37.65,5.73 U1.96 37.65,7.52 37.21,7.96 v1(36.4,7.96) ; 37.4,26.28 37.65,26.53 U1.13 ; 37.4,26.28 32.44,26.28 31.65,27.07 U1.25 ; 46.74,34.09 IC1.14 ; IC1.14 IC1.15 ; IC1.14 46.74,35.66 ; 49.28,34.09 IC1.15 ; IC1.15 IC1.16 ; IC1.15 49.28,35.66 ; IC1.16 IC1.17 ; J2.S4 2.67,34.41 ; J2.S4 2.67,33.25 ; J2.S4 1.69,33.83 ; J2.S4 J2.S2 8.09,33.83 ; 5.16,13.77 J1.5 ; J1.5 4.18,14.74 ; J1.5 6.13,14.74 ; J1.5 5.16,15.72 ; R34.2 10.95,34.5 ; R34.2 10.95,35.41 ; R34.2 10.3,34.96 ; R34.2 11.6,34.96 ; 54.36,34.09 IC1.17 ; IC1.17 54.36,35.66 ; IC1.17 55.14,34.87 ; 2.67,41.89 J2.S3 ; J2.S3 2.67,43.05 ; J2.S3 1.69,42.47 ; 13.39,15.43 Y1.2 ; Y1.2 13.39,17.6 ; Y1.2 14.37,16.51 ; Y1.2 12.42,16.51 ; IC1.9 46.74,45.82 ; IC1.9 IC1.8 ; IC1.9 46.74,44.25 ; IC1.22 67.84,34.87 ; IC1.22 66.27,34.87 ; IC1.22 67.06,35.66 ; U6.27 63.28,20.92 63.02,21.18 63.02,21.27 62.77,21.53 v1(62.27,21.53) 61.34,21.53 60.1,20.28 ; 25.99,17.27 25.74,17.52 U1.54 18.69,17.52 18.61,17.6 13.39,17.6 ; 25.99,17.27 26.5,17.78 26.5,18.63 25.1,20.02 U1.49 ; 58.65,34.87 IC1.19 ; IC1.19 60.22,34.87 ; IC1.19 59.44,34.09 ; IC1.19 59.44,35.66 ; 60.1,20.28 v1(60.1,14.84) v1(61.08,14.84) ; 60.1,20.28 v1(59.26,20.28) ; C26.2 7.66,28.41 ; C26.2 6.36,28.41 ; C26.2 7.01,27.96 ; U1.113 v1(43.9,10.52) ; 10.97,40.92 R33.2 ; R33.2 10.32,41.36 ; R33.2 11.62,41.36 ; J1.11 5.16,21.72 ; J1.11 5.16,19.77 ; J1.11 6.13,20.74 ; J1.11 4.18,20.74 ; IC1.8 49.28,45.82 ; IC1.8 49.28,44.25
  TOP w0.254: U6.6 56.6,18.32 56.29,18.63 56.29,19.32 56.6,19.62 U6.4 58.6,19.62 v1(59.26,20.28) ; R26.1 67.08,33.98 67.06,34.01 IC1.22 ; U6.19 63.17,15.72 arc(62.84,15.66) 62.56,15.47 62.13,15.04 arc(61.9,14.89) 61.64,14.84 v1(61.08,14.84)
  BOTTOM w0.127: C19.2 28.03,19.55 ; C19.2 27.57,18.9 ; C19.2 28.48,18.9 ; J1.9 6.13,18.74 ; J1.9 4.18,18.74 ; J1.9 J1.7 ; J1.9 J1.11 ; 2.22,37.82 1.97,37.57 1.97,36.65 2.22,36.4 R32.2 ; 2.22,37.82 3.91,37.82 4.99,36.74 4.99,34.4 5.57,33.83 J2.S2 ; 2.22,37.82 2.22,39.4 ; 20.36,44.54 C12.2 ; C12.2 21.65,44.54 ; C12.2 21.01,44.99 ; C12.2 21.01,43.98 21.67,43.32 21.67,39.21 ; 36.4,10.2 C23.2 35.41,10.66 34.11,10.66 ; 36.4,10.2 39.55,13.35 42.59,13.35 ; 36.4,10.2 v1(36.4,7.96) ; C1.1 26.97,38.51 26.28,39.21 21.67,39.21 ; C1.1 26.33,38.04 ; C1.1 26.97,37.59 ; C1.1 27.62,38.04 ; 26.98,23.63 26.98,21.32 ; 26.98,23.63 26.98,23.89 26.31,23.89 C10.2 ; 26.98,23.63 28.6,23.63 28.8,23.83 C9.2 ; 26.98,21.32 26.98,19.49 27.57,18.9 ; 26.98,21.32 26.31,21.32 C11.2 ; R31.1 3.13,39.4 ; R31.1 2.68,38.75 ; R31.1 2.68,40.04 ; R31.1 2.22,39.4 ; 54.36,44.25 IC1.6 ; IC1.6 54.36,45.82 ; IC1.6 55.14,45.03 ; IC1.6 53.57,45.03 ; C2.2 42.59,14.91 ; C2.2 42.13,14.26 ; C2.2 42.13,15.56 ; C2.2 41.68,14.91 ; 42.59,14.91 42.59,13.35 ; 42.59,14.91 42.59,16.23 C5.2 ; C20.2 30.3,24.81 ; C20.2 29.65,24.35 ; C20.2 30.3,23.9 ; 30.3,24.81 31.6,24.81 ; 30.3,24.81 28.8,24.81 C9.2 ; 51.03,34.87 IC1.16 ; IC1.16 51.82,34.09 ; IC1.16 51.82,35.66 ; IC1.16 52.6,34.87 ; 27.61,14.43 R39.1 ; R39.1 28.05,15.08 ; R39.1 28.51,14.43 ; R39.1 28.05,13.78 ; C6.2 42.32,24.84 42.12,25.04 41.7,25.04 v1(41.08,25.65) 41.64,26.21 41.64,34.06 41.66,34.07 IC1.12 ; C22.2 41.15,9.79 43.47,9.79 43.73,9.53 ; C22.2 41.15,10.7 ; C22.2 41.8,10.25 ; C22.2 40.5,10.25 ; IC1.18 56.9,35.66 ; IC1.18 IC1.19 ; IC1.18 56.9,34.09 ; IC1.18 IC1.17 ; C21.2 31.6,24.81 ; C21.2 32.25,24.35 ; C21.2 31.6,23.9 ; 31.6,24.81 33.5,24.81 ; C15.1 14.74,31.6 ; C15.1 14.29,32.25 ; C15.1 14.29,30.95 ; C15.1 13.82,31.6 12.74,32.68 v1(12.74,34.5) ; 16.26,38.95 21.41,38.95 21.67,39.21 ; 16.26,38.95 16,39.21 v1(15.05,39.21) 15.05,38.49 C29.2 ; 16.26,38.95 C30.2 ; 67.06,34.09 IC1.22 ; IC1.22 67.84,34.87 ; IC1.22 67.06,35.66 ; IC1.22 66.27,34.87 ; 32.82,9.75 C24.2 ; C24.2 32.82,10.66 ; C24.2 32.17,10.2 ; 28.87,10.66 28.87,5.05 28.62,4.8 R1.1 ; 28.87,10.66 32.82,10.66 ; 28.87,10.66 28.62,10.66 28.62,10.91 ; 4.18,22.74 J1.13 ; J1.13 5.16,23.72 ; J1.13 6.13,22.74 ; J1.13 J1.11 ; C4.2 42.63,21.46 43.02,21.07 43.02,19.77 ; C4.2 42.13,20.81 ; C4.2 41.68,21.46 ; C4.2 42.13,22.11 ; J2.S3 1.68,42.47 1.43,42.22 1.43,40.19 2.22,39.4 ; J2.S3 2.67,43.05 ; J2.S3 2.67,41.89 ; J2.S3 3.65,42.47 ; 32.82,10.66 34.11,10.66 ; 40.87,34.87 IC1.12 ; IC1.12 42.44,34.87 ; IC1.12 IC1.11 ; J1.3 6.13,12.74 ; J1.3 4.18,12.74 ; J1.3 J1.1 ; J1.3 J1.5 ; C7.2 36.69,24.35 ; C7.2 36.04,23.9 ; C7.2 36.04,24.81 34.8,24.81 ; IC1.15 49.28,35.66 ; IC1.15 50.06,34.87 ; IC1.15 48.49,34.87 ; IC1.15 49.28,34.09 ; 60.76,15.16 v1(61.08,14.84) ; v1(61.08,14.84) 61.4,14.52 ; v1(61.08,14.84) 60.62,14.38 ; v1(61.08,14.84) 61.54,15.3 ; 45.95,34.87 IC1.14 ; IC1.14 47.52,34.87 ; IC1.14 46.74,34.09 ; IC1.14 46.74,35.66 ; IC1.19 59.44,35.66 ; IC1.19 59.44,34.09 ; IC1.19 IC1.20 ; IC1.8 49.28,45.82 ; IC1.8 49.28,44.25 ; IC1.8 48.49,45.03 ; IC1.8 50.06,45.03 ; 28.62,10.91 28.04,10.91 27.79,10.66 ; 28.62,10.91 28.62,12.83 28.51,12.93 ; 51.03,45.03 IC1.7 ; IC1.7 52.6,45.03 ; IC1.7 51.82,45.82 ; IC1.7 51.82,44.25 ; 4.18,14.74 J1.5 ; J1.5 J1.7 ; J1.5 6.13,14.74 ; 27.79,10.66 26.41,10.66 26.01,11.06 R37.1 ; 27.79,10.66 C25.2 ; 40.87,45.03 IC1.11 ; IC1.11 41.66,45.82 ; IC1.11 42.44,45.03 ; U4.4 17.31,8.32 ; U4.4 16.27,7.82 15.51,7.06 8.84,7.06 J1.1 ; U4.4 17.31,7.33 ; U4.4 18.12,7.82 ; IC1.10 44.2,45.82 ; IC1.10 43.41,45.03 ; IC1.10 44.2,44.25 ; IC1.10 44.98,45.03 ; 27.57,18.9 27.57,17.6 C13.2 28.51,17.6 28.51,14.43 ; 28.51,12.93 28.51,14.43 ; 28.51,12.93 C14.2 ; 5.16,9.77 J1.1 ; J1.1 6.13,10.74 ; J1.1 4.18,10.74 ; IC1.17 54.36,35.66 ; IC1.17 53.57,34.87 ; IC1.17 54.36,34.09 ; C14.2 28.05,13.58 ; C14.2 27.61,12.93 ; C14.2 28.05,12.28 ; IC1.13 44.98,34.87 ; IC1.13 44.2,34.09 ; IC1.13 44.2,35.66 ; IC1.13 43.41,34.87 ; 33.5,23.9 C8.2 ; C8.2 33.5,24.81 ; C8.2 32.85,24.35 ; 42.59,13.35 43.9,12.03 v1(43.9,10.52) 43.9,9.71 43.73,9.53 ; J2.S4 3.65,33.83 ; J2.S4 1.69,33.83 ; J2.S4 2.67,33.25 ; J2.S4 2.67,34.41 ; C30.2 16.9,38.49 ; C30.2 16.26,38.05 ; D1.1 61.05,8.88 ; D1.1 60.54,8.23 60.1,8.67 v1(60.1,14.84) ; D1.1 61.5,8.23 ; D1.1 61.05,7.58 ; 43.02,19.77 43.02,19.27 42.63,18.87 C3.2 41.67,18.87 41.67,17.58 ; 43.02,19.77 v1(43.54,19.77) ; 33.5,24.81 34.8,24.81 ; 34.8,24.81 C16.2 ; 42.13,15.58 C5.2 ; C5.2 41.67,16.23 41.67,17.58 ; C5.2 42.13,16.88 ; 34.11,10.66 C18.2 ; C29.2 14.96,38.94 ; C29.2 14.96,38.05 ; C29.2 14.31,38.49 ; J2.S2 8.08,33.83 ; J2.S2 6.85,33.13 ; J2.S2 6.85,34.53 ; 41.67,17.58 C17.2 ; J2.S1 6.85,43.17 ; J2.S1 5.62,42.47 ; J2.S1 6.85,41.77 ; J2.S1 8.08,42.47 ; 66.05,20.46 C31.2 ; C31.2 66.7,20.91 ; C31.2 66.7,20.01 ; C31.2 67.35,20.46 ; C10.2 26.96,24.35 ; C10.2 25.67,24.35 ; C10.2 26.31,24.79 ; R32.2 2.68,35.75 ; R32.2 2.68,37.05 ; 25.67,21.78 C11.2 ; C11.2 26.31,22.23 ; C11.2 26.96,21.78 ; v1(62.27,21.53) 66.85,21.53 67.55,20.83 67.55,20.33 ; v1(59.26,20.28) 59.91,20.28 ; v1(59.26,20.28) 59.26,25.53 v1(57.2,27.58) ; v1(59.26,20.28) 59.26,19.83 ; J1.7 6.13,16.74 ; J1.7 4.18,16.74 ; C9.2 29.45,24.35 ; C9.2 28.16,24.35 ; J1.11 6.13,20.74 ; J1.11 4.18,20.74 ; R37.1 26.66,11.52 ; R37.1 26.01,11.97 ; IC1.20 62.76,34.87 ; IC1.20 61.98,34.09 ; IC1.20 61.98,35.66 ; 46.74,44.25 IC1.9 ; IC1.9 46.74,45.82 ; IC1.9 45.95,45.03 ; IC1.9 47.52,45.03 ; 67.1,15.72 C35.1 ; C35.1 67.55,15.07 ; C35.1 68,15.72 ; 67.1,17.02 C34.1 68,17.02 ; 43.73,9.53 43.73,7.09 v1(44.22,6.6) ; 27.14,10.2 C25.2 ; C25.2 27.79,9.75 ; C25.2 28.44,10.2
  BOTTOM w0.254: C35.1 C34.1 C38.1 ; C38.1 68.88,18.31 v1(69.14,18.06) ; C38.1 67.55,20.33 67.37,20.51 66.75,20.51 C31.2
ADCCLK: length 6.5
  TOP w0.254: U1.138 46.51,23.02 49.9,19.63 R24.1
CCD_ICG: length 24.1
  TOP w0.254: U1.9 39.65,28.88 40.22,29.45 45.71,29.45 48.5,26.66 R30.1
CCD_MASTER: length 14.2
  TOP w0.254: U1.11 38.66,27.96 38.66,29.11 39.94,30.39 46.14,30.39 46.94,29.59 R28.1
CCD_OS: length 11.4
  TOP w0.254: v1(62.2,20.54) 62.95,20.54 63.21,20.27 U6.26 65.42,20.27 65.82,20.68 R27.2 65.82,25.69 65.81,25.71 Q1.3
  BOTTOM w0.254: v1(62.2,20.54) 62.18,20.51 R9.2
CCD_SH: length 13.7
  TOP w0.254: R29.1 47.54,28.27 45.92,29.9 40.08,29.9 39.14,28.96 39.14,27.95 U1.10
CDSCLK1: length 6.2
  TOP w0.254: U1.142 46.51,25.02 49.3,22.23 R22.1
CDSCLK2: length 6.4
  TOP w0.254: U1.140 46.51,24.02 49.6,20.93 R23.1
CLK_50M: length 2.5
  TOP w0.381: U1.56 23.23,16.52 23.23,16.51
  TOP w0.508: 23.23,16.51 R5.1
HT82V38_D0: length 5.9
  TOP w0.254: U1.114 46.51,11.02 46.53,11 46.61,11 48.64,8.97 R18.1
HT82V38_D1: length 5.6
  TOP w0.254: U1.115 46.62,11.52 47.86,10.29 R17.1
HT82V38_D2: length 5.3
  TOP w0.254: R16.1 47.08,11.61 46.66,12.02 U1.116
HT82V38_D3: length 5.3
  TOP w0.254: R15.1 47.1,12.93 46.7,12.52 U1.117
HT82V38_D4: length 5.6
  TOP w0.254: U1.118 46.66,13.02 46.89,13.26 46.9,13.26 47.89,14.25 R14.1
HT82V38_D5: length 5.9
  TOP w0.254: U1.119 45.58,13.51 46.61,13.51 46.74,13.64 46.74,13.64 48.7,15.6 R13.1
HT82V38_D6: length 6.3
  TOP w0.254: R12.1 49.53,16.97 46.58,14.02 45.58,14.02 U1.120
HT82V38_D7: length 6.6
  TOP w0.254: U1.121 46.4,14.52 50.14,18.26 R11.1
M0: length 14.3
  TOP w0.127: v1(22.17,10.62) 22.77,10.02 U1.69
  BOTTOM w0.127: R37.2 26.01,9.28 23.03,6.3 21.98,6.3 21.29,6.99 21.29,9.73 v1(22.17,10.62) 22.17,10.62 22.17,9.92 R36.1
M1: length 5.3
  TOP w0.127: v1(25.5,14.43) 25.48,14.45 24.23,14.45 U1.60
  BOTTOM w0.127: R38.1 24.94,14.49 25,14.43 v1(25.5,14.43) R39.2
SCLK: length 44
  TOP w0.254: R20.2 70.72,13.77 72.39,12.09 72.39,6.4 70.64,4.65 40,4.65 39.15,5.5 U1.99
SDATA: length 40.6
  TOP w0.254: U1.100 39.65,5.66 40.01,5.31 70.21,5.31 71.65,6.76 71.65,11.99 71.64,11.99 71.16,12.47 R19.2
SLOAD: length 47.8
  TOP w0.254: U1.98 38.65,5.06 39.75,3.96 70.92,3.96 73.13,6.17 73.13,12.65 70.72,15.06 R21.2
SPI_FLASH_CLK: length 12
  TOP w0.254: v1(12.36,9.09) 22.58,9.09 23.01,9.52 23.06,9.52 23.07,9.52 U1.70
SPI_FLASH_CSO: length 32.6
  TOP w0.254: v1(20.12,25.6) 23.29,25.52 U1.38
  BOTTOM w0.254: U4.1 R6.2 11.86,13.59 10.79,14.66 10.79,24.36 11.51,25.07 18.57,25.07 19.1,25.6 v1(20.12,25.6)
SPI_FLASH_MISO: length 4.6
  TOP w0.254: R7.2 20.36,11.98 23.29,12.02 U1.65
SPI_FLASH_MOSI: length 9.2
  TOP w0.254: R8.1 15.79,12.48 19.06,12.5 19.06,12.5 19.35,12.5 23.29,12.52 23.29,12.52 U1.64
TCK_F: length 55.5
  TOP w0.254: J1.6 8.92,12.98 8.92,5.36 v1(12.5,1.78) ; U1.109 46.11,8.52 46.46,8.18 v1(46.46,6.17)
  BOTTOM w0.254: v1(12.5,1.78) 44.68,1.78 46.46,3.56 v1(46.46,6.17)
TDI_F: length 61.1
  TOP w0.254: v1(48.87,6.83) 46.68,9.02 U1.110 ; v1(47.17,3.15) 13.41,3.15 10.13,6.43 10.13,15.77 J1.10
  BOTTOM w0.254: v1(47.17,3.15) 48.13,3.15 48.87,3.89 v1(48.87,6.83)
TDO_F: length 58.1
  TOP w0.254: U1.106 42.65,7.53 42.65,7.53 v1(42.65,10.82) ; J1.8 9.47,14.43 9.47,6.15 v1(13.06,2.57)
  BOTTOM w0.254: v1(42.65,10.82) 41.68,11.79 38.81,11.79 37.21,10.19 37.21,4.37 35.41,2.57 v1(13.06,2.57)
TMS_F: length 54.2
  TOP w0.254: v1(43.28,2.41) 41.86,0.99 12.4,0.99 8.38,5 8.38,11.52 J1.4 ; v1(44.4,8) 43.62,8 43.15,7.53 U1.107
  BOTTOM w0.254: v1(44.4,8) 44.88,7.52 44.88,4.01 v1(43.28,2.41)
UART_RXD: length 14.4
  TOP w0.127: U1.33 27.65,28.82 19.08,37.39 U5.8
UART_TXD: length 15.2
  TOP w0.127: U5.9 19.16,37.89 19.16,37.89 28.15,28.9 U1.32
USB_D+: length 11.3
  TOP w0.127: U5.1 13.55,38.48 arc(13.17,39.39) 12.26,39.76 R33.1 10.53,39.76 arc(10.12,39.68) 9.78,39.45 8.6,38.28 8.47,38.28 arc(8.42,38.29) 8.38,38.31 8.33,38.36 arc(8.29,38.39) 8.24,38.4 J2.A6 v1(6.23,38.4) ; J2.B6 7.48,37.39 v1(6.2,37.39)
  BOTTOM w0.127: v1(6.23,38.4) 6.22,38.4 5.89,38.07 5.89,37.69 v1(6.2,37.39)
USB_D-: length 12.5
  TOP w0.127: R34.1 10.97,36.56 ; R34.1 10.51,36.56 arc(10.1,36.64) 9.75,36.88 8.6,38.02 8.47,38.02 arc(8.42,38.01) 8.38,37.99 8.33,37.94 arc(8.29,37.91) 8.24,37.9 J2.A7 5.66,37.9 5.44,38.13 5.44,38.61 5.74,38.91 7.48,38.91 J2.B7 ; R34.1 10.95,37.23 arc(11.14,37.69) 11.61,37.89 U5.2
N00968: length 5.4
  TOP w0.127: v1(25.34,25.98) 25.34,25.22 25.14,25.02 U1.39
  BOTTOM w0.127: v1(25.34,25.98) 23,25.98 22.61,25.58 R4.2
N10342: length 2.5
  TOP w0.508: Y1.3 R5.2
N10587: length 2.3
  BOTTOM w0.254: U4.2 v1(19.63,10.36)
N10677: length 4.4
  BOTTOM w0.254: U4.5 12.67,7.82 15.06,10.21 v1(15.06,10.87)
N14884: length 4.1
  TOP w0.127: v1(21.31,26.16) 21.81,26.16 21.95,26.02 U1.37
  BOTTOM w0.127: R3.2 v1(21.31,26.16)
N15354: length 2.5
  TOP w0.127: U1.73 26.15,5.77 25.85,5.47 v1(25.85,5.46)
  BOTTOM w0.127: v1(25.85,5.46) 25.85,4.93 25.98,4.8 R1.2
N15645: length 3.5
  TOP w0.127: v1(22.03,7.72) 22.84,8.52 U1.72
  BOTTOM w0.127: v1(22.03,7.72) 22.23,7.72 22.53,8.02 R2.1
N29928: length 3.3
  TOP w0.127: U5.10 18.34,38.39 18.59,38.64 18.59,39.54 18.02,40.11 C28.2
N30787: length 12.1
  TOP w0.127: U2.4 v1(24.64,37.6) U2.2
  TOP w0.508: R41.1 24.65,35.32 24.64,35.32 U2.4
  BOTTOM w0.127: v1(24.64,37.6) 26.2,37.6 26.3,37.51 26.58,37.51 26.97,37.12 C1.2
N30939: length 12.5
  TOP w0.127: U3.4 v1(14.82,29.16) U3.2
  TOP w0.508: U3.4 17.54,29.16 17.54,29.14 R42.1
  BOTTOM w0.127: C15.2 15.39,31.6 14.82,31.03 v1(14.82,29.16)
N39536: length 4.5
  TOP w0.254: U6.17 67.43,14.42 68.07,15.06 R21.1
N39538: length 4.3
  TOP w0.254: R20.1 68.07,13.77 68.06,13.77 U6.16
N39540: length 4.5
  TOP w0.254: R19.1 68.07,12.47 67.42,13.12 U6.15
N39901: length 5.6
  TOP w0.254: v1(62.05,16.01) 63.21,16.37 U6.20 65.42,16.37 v1(65.95,15.72)
  BOTTOM w0.254: C37.2 v1(62.05,16.01)
N39920: length 5.3
  TOP w0.254: v1(65.95,17.02) U6.21 63.21,17.02 v1(62.05,17.61)
  BOTTOM w0.254: C37.1 v1(62.05,17.61)
N40100: length 1.6
  TOP w0.254: v1(65.95,18.31) U6.23
N41358: length 2.1
  TOP w0.254: v1(62.2,18.94) 63.21,18.97 U6.24
N41362: length 4.1
  TOP w0.254: 60.72,18.91 v1(60.73,18.91) 61.35,18.29 62.6,18.29 63.21,17.67 U6.22
N41426: length 4.9
  TOP w0.254: U6.25 65.42,19.62 68.47,19.65 R35.1
N42799: length 5.5
  TOP w0.254: U6.9 53.99,16.37 53.21,15.6 R13.2
N42805: length 5.7
  TOP w0.254: R14.2 52.78,14.25 54.26,15.72 U6.10
N42811: length 5.1
  TOP w0.254: R12.2 52.78,16.97 56.29,17.02 U6.8
N42817: length 6
  TOP w0.254: R15.2 52.36,13.03 52.81,13.03 54.85,15.07 U6.11
N42823: length 6.9
  TOP w0.254: U6.14 56.79,13.12 52.63,8.97 R18.2
N42829: length 6.6
  TOP w0.254: R17.2 52.81,10.29 56.29,13.77 U6.13
N42835: length 6.3
  TOP w0.254: U6.12 55.67,14.42 52.86,11.61 R16.2
N42841: length 5.4
  TOP w0.254: U6.7 53.37,17.67 52.78,18.26 R11.2
N43637: length 5.4
  TOP w0.254: R22.2 53.05,22.23 arc(53.17,22.2) 53.28,22.13 53.74,21.67 arc(53.84,21.6) 53.97,21.57 U6.1
N43673: length 5.1
  TOP w0.254: U6.2 52.79,20.92 52.78,20.93 R23.2
N43709: length 5.4
  TOP w0.254: R24.2 53.03,19.63 arc(53.15,19.66) 53.26,19.73 53.71,20.18 arc(53.81,20.25) 53.94,20.27 U6.3
N45080: length 2.8
  TOP w0.254: IC1.21 R25.1
N45186: length 2.1
  TOP w0.254: Q1.2 64.85,28.98 64.52,29.31 R25.2
N45216: length 2
  TOP w0.254: Q1.1 66.75,28.98 67.08,29.31 R26.2
N45901: length 20.9
  TOP w0.254: U7.5 58.14,27.58 57.53,28.19 v1(57.53,30.76) ; v1(55.6,32.18) 55.6,43.74 IC1.5
  BOTTOM w0.254: v1(55.6,32.18) 55.6,31.5 56.06,31.04 57.25,31.04 v1(57.53,30.76)
N45905: length 21.3
  TOP w0.254: v1(60.76,32.18) 60.76,43.81 IC1.3 ; U7.2 55.86,28.91 56.62,29.66 56.62,31.93 56.87,32.18 v1(57.12,32.18)
  BOTTOM w0.254: v1(60.76,32.18) v1(57.12,32.18)
N45930: length 2.2
  TOP w0.254: U7.6 60.03,28.24 60.72,28.26 R30.2
N46162: length 3.1
  TOP w0.254: R28.2 52.94,29.59 54.72,29.57 U7.1
N46224: length 3.1
  TOP w0.254: R29.2 52.92,28.27 54.72,28.24 U7.3
N46412: length 17.6
  TOP w0.254: U7.7 58.52,28.91 58.12,29.31 58.12,43.71 IC1.4
N48976: length 4.6
  TOP w0.127: J2.B5 v1(3.58,36.4)
  BOTTOM w0.127: v1(3.58,36.4) 3.58,36.4 R32.1
N49298: length 4.4
  TOP w0.127: v1(4.88,38.49) 5.78,39.4 J2.A5
  BOTTOM w0.127: R31.2 4.75,39.4 4.88,39.27 v1(4.88,38.49)
N49459: length 7.8
  TOP w0.127: J2.A8 6.65,36.9 6.65,36.89 5.71,36.89 4.38,38.23 4.38,38.76 5.52,39.9 J2.B8
N103518: length 23.9
  TOP w0.127: U1.143 v1(49.36,25.52)
  BOTTOM w0.127: R40.1 55.02,8.2 49.36,13.86 v1(49.36,25.52)
N103582: length 2.4
  BOTTOM w0.127: R40.2 58.96,8.2 58.99,8.23 D1.2

## Copper pours and planes (outline as drawn; the poured copper is in the pictures)
GND on TOP, BOTTOM: 0.03,46.79 0.03,0.03 75.36,0.03 75.36,46.79
